# EAGLE board Joystick PCB Board (EAGLE 9.7.0)
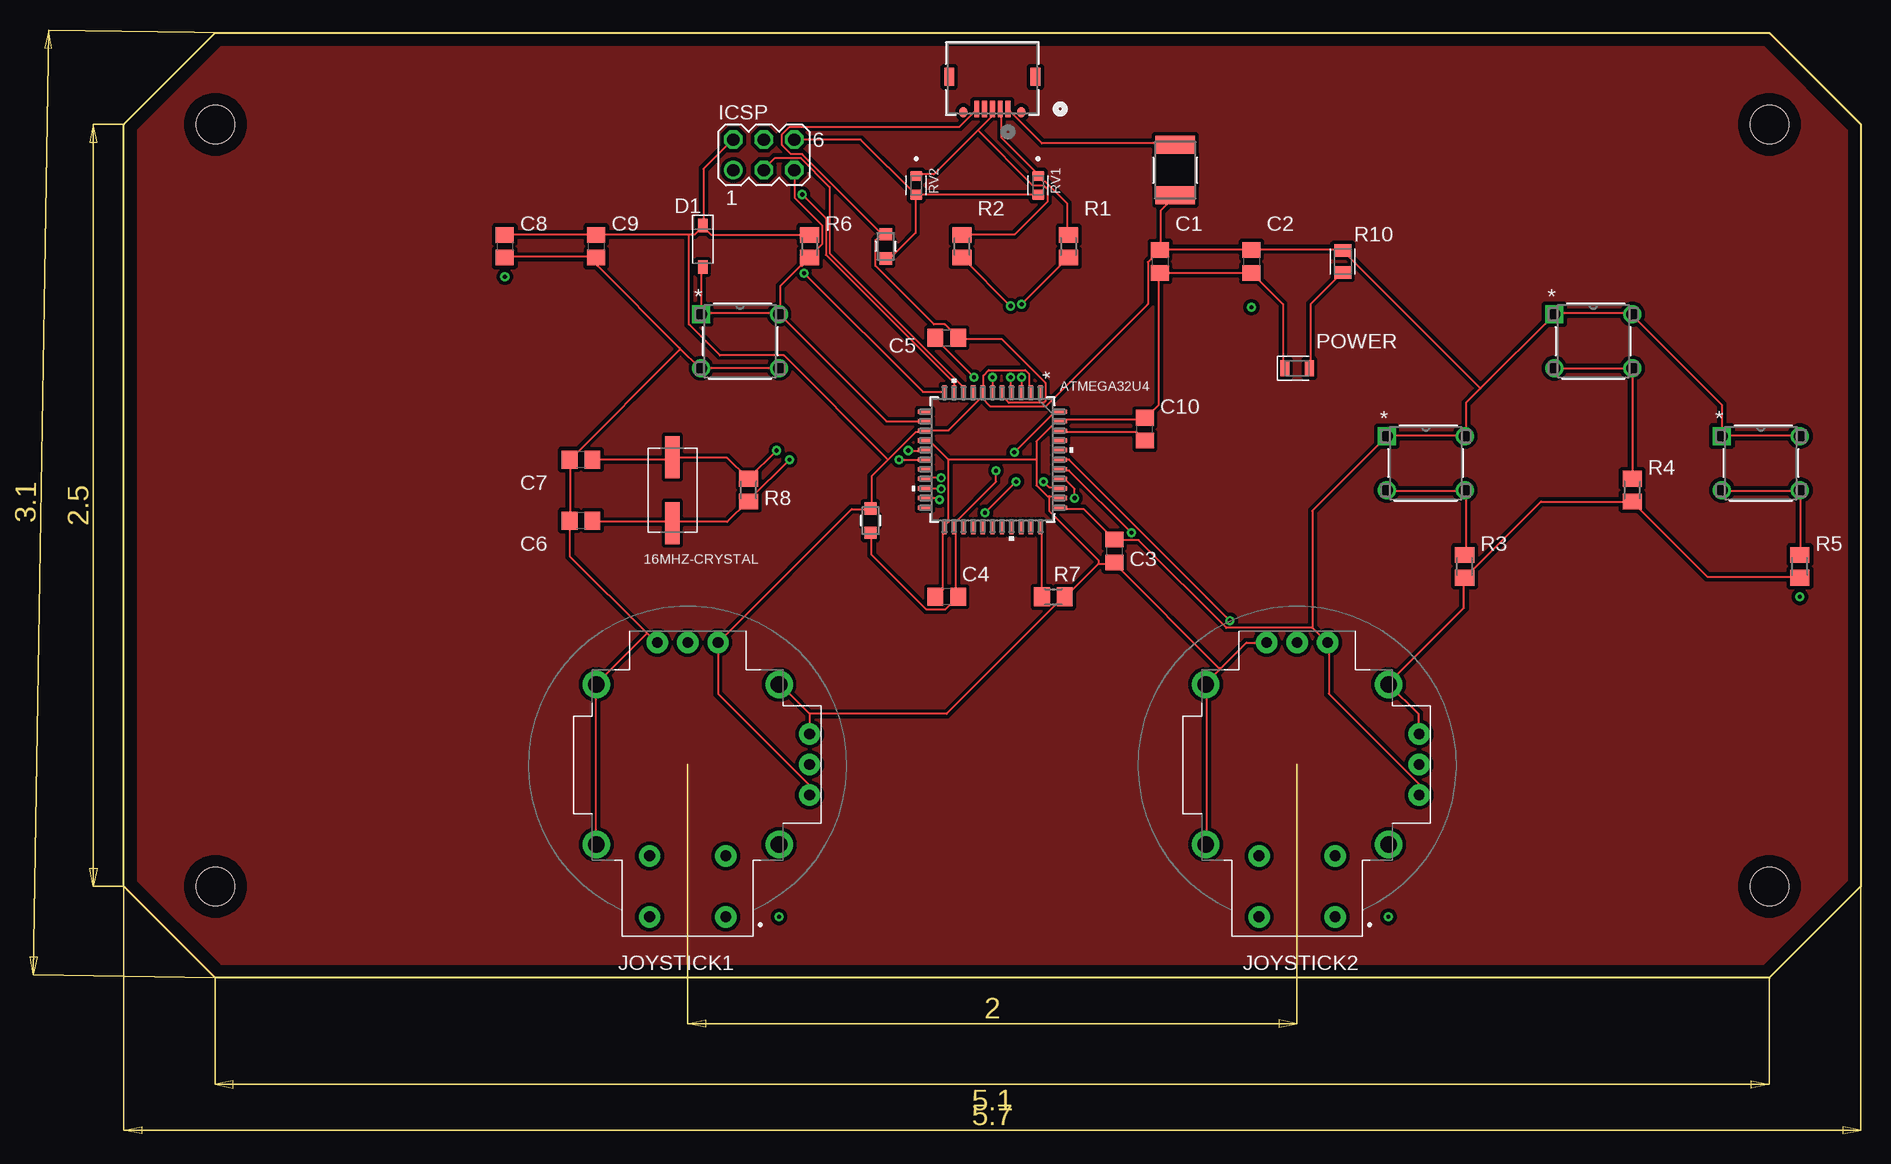
[diagram p0: board, top side]
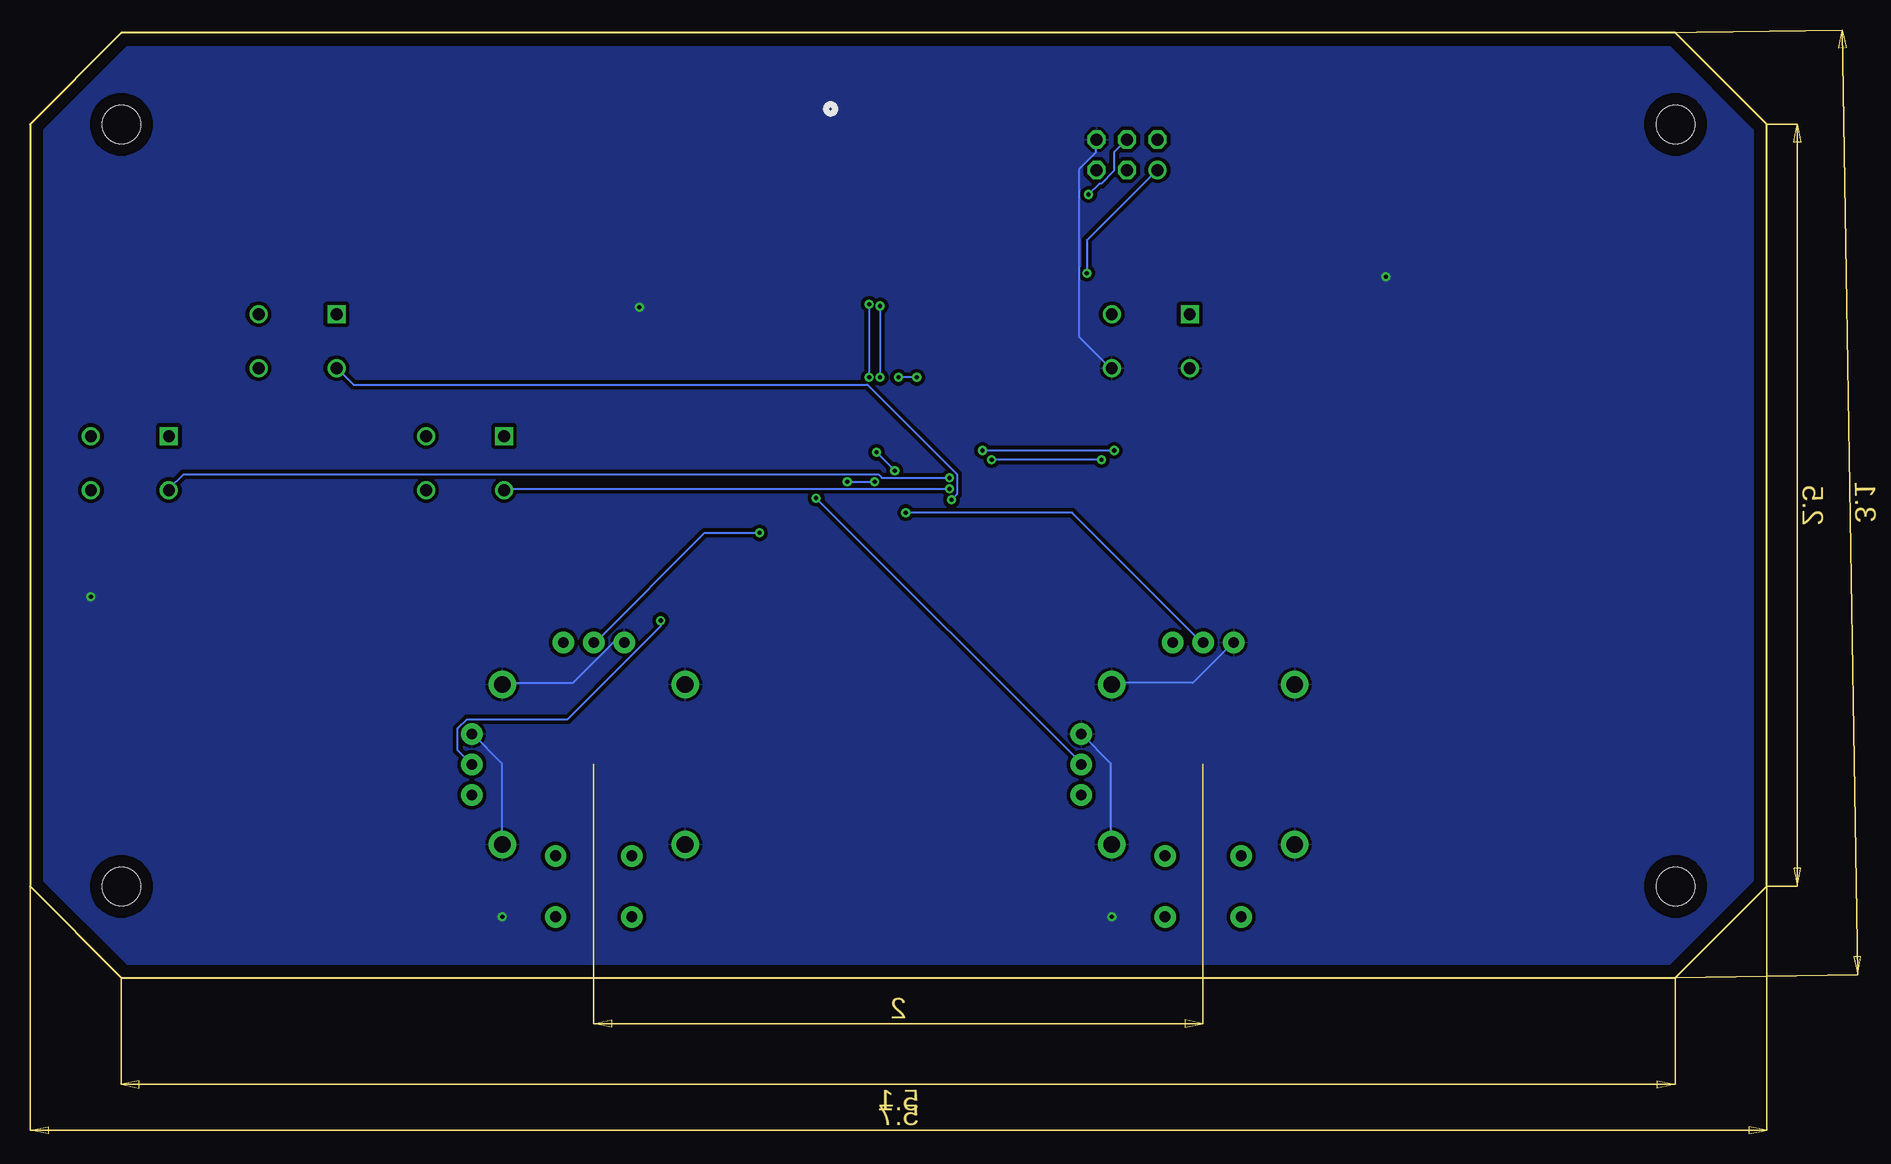
[diagram p1: board, bottom side, seen from below]

Size 144.78 x 78.74 mm. Coordinates in mm from the lower left corner, seen from the top.
Outline: 137.16,78.74 144.78,71.12 144.78,7.62 137.16,0 7.62,0 0,7.62 0,71.12 7.62,78.74 137.16,78.74
Copper layers (1*16): Top / Bottom
Stack-up Default Layer Stack: Top User Defined 0.035mm / Dielectric-1 User Defined 1.5mm / Bottom User Defined 0.035mm
Design rules: minimum drill size 0.35mm, minimum copper width 6mil, keepout clearance 0mil, drill distance 6mil, via restrict clearance 0mil, dimension clearance 40mil, restrict clearance 0mil, copper clearance wire_polygon to wire_polygon 6mil, copper clearance wire_polygon to pad_smd 6mil, copper clearance wire_polygon to via 6mil, copper clearance pad_smd to pad_smd 6mil, copper clearance pad_smd to via 6mil, copper clearance via to via 6mil, copper clearance smd to pad (same net) 6mil, copper clearance smd to via (same net) 6mil, copper clearance smd to smd (same net) 6mil
Holes 3.17 mm at 137.16,71.12 7.62,71.12 7.62,7.62 137.16,7.62

## Footprints (pad centres in the part's own frame; a part is rotated, then mirrored left to right if it is on the bottom)
XTAL_ECS-160-20-3X-TR = smd 3.5 x 1.2: 1 -2.75,0; 2 2.75,0
44ML_ATM-L = smd 1.143 x 0.356: 1 -5.626,4; 2 -5.626,3.2; 3 -5.626,2.4; 4 -5.626,1.6; 5 -5.626,0.8; 6 -5.626,0; 7 -5.626,-0.8; 8 -5.626,-1.6; 9 -5.626,-2.4; 10 -5.626,-3.2; 11 -5.626,-4; 23 5.626,-4; 24 5.626,-3.2; 25 5.626,-2.4; 26 5.626,-1.6; 27 5.626,-0.8; 28 5.626,0; 29 5.626,0.8; 30 5.626,1.6; 31 5.626,2.4; 32 5.626,3.2; 33 5.626,4 | smd 0.356 x 1.143: 12 -4,-5.626; 13 -3.2,-5.626; 14 -2.4,-5.626; 15 -1.6,-5.626; 16 -0.8,-5.626; 17 0,-5.626; 18 0.8,-5.626; 19 1.6,-5.626; 20 2.4,-5.626; 21 3.2,-5.626; 22 4,-5.626; 34 4,5.626; 35 3.2,5.626; 36 2.4,5.626; 37 1.6,5.626; 38 0.8,5.626; 39 0,5.626; 40 -0.8,5.626; 41 -1.6,5.626; 42 -2.4,5.626; 43 -3.2,5.626; 44 -4,5.626
C0805 = smd 1.3 x 1.5: 1 -0.95,0; 2 0.95,0
SOD3715X135 = smd 1.127 x 0.784: 1 -1.722,0; 2 1.722,0
IND_BOURNS_MH2029 = smd 1.016 x 1.016: 1 -1.016,0; 2 1.016,0
FUSE_F050-2 = smd 1.499 x 3.302: 1 -2.095,0; 2 2.095,0
MA03-2 = drill 1.016: 1 -2.54,-1.27 | drill 1.016 octagon: 2 -2.54,1.27; 3 0,-1.27; 4 0,1.27; 5 2.54,-1.27; 6 2.54,1.27
XDCR_COM-09032 = drill 0.9 pad 1.778: B1A -3.175,12.7; B1B 3.175,12.7; B2A -3.175,7.62; B2B 3.175,7.62 | drill 0.889 pad 1.778: H1 -2.54,-10.16; H2 0,-10.16; H3 2.54,-10.16; V1 -10.16,2.54; V2 -10.16,0; V3 -10.16,-2.54 | drill 1.397 pad 2.286: S1 -7.62,6.668; S2 -7.62,-6.668; S3 7.62,-6.668; S4 7.62,6.668
ZX62D-B-5P8(30)_HIR = smd 0.406 x 1.346: 1 -1.3,2.525; 2 -0.65,2.525; 3 0,2.525; 4 0.65,2.525; 5 1.3,2.525 | smd 0.65 x 0.85: 6 -2.425,2.799; 7 2.425,2.799 | smd 0.813 x 1.499: 8 -3.6,-0.15; 9 3.6,-0.15
LEDC2012X110N_FLAT-B = smd 0.762 x 1.362: A 1.025,0; C -1.025,0
M0805 = smd 1.3 x 1.6: 1 -0.95,0; 2 0.95,0
RESC2012X65 = smd 1.031 x 1.42: 1 -0.919,0; 2 0.919,0
VARC1608X56N = smd 0.87 x 1.02: 1 -0.78,0; 2 0.78,0
SW4_1825910-A_TEC = drill 0.991 pad 1.499 square: 1 -6.5,4.5 | drill 0.991 pad 1.499: 2 0,4.5; 3 -6.5,0; 4 0,0

## Placement (x,y rotation side)
16MHZ-CRYSTAL  ECS-160-20-3X-TR  [XTAL_ECS-160-20-3X-TR]  45.72,40.64 270 top
ATMEGA32U4  ATMEGA32U4-AU44ML_ATM-L  [44ML_ATM-L]  72.39,43.18 270 top
C1  10uF  [C0805]  86.36,59.69 270 top
C2  0.1uF  [C0805]  93.98,59.69 270 top
C3  0.1uF  [C0805]  82.55,35.56 270 top
C4  0.1uF  [C0805]  68.58,31.75 180 top
C5  0.1uF  [C0805]  68.58,53.34 0 top
C6  20pF  [C0805]  38.1,38.1 180 top
C7  20pF  [C0805]  38.1,43.18 180 top
C8  0.1uF  [C0805]  31.75,60.96 270 top
C9  0.1uF  [C0805]  39.37,60.96 270 top
C10  0.1uF  [C0805]  85.09,45.72 90 top
D1  1N4148W  [SOD3715X135]  48.26,60.96 270 top
FERRITEBEAD1  MH2029-300YIND_BOURNS_MH2029  [IND_BOURNS_MH2029]  63.5,60.96 90 top
FERRITEBEAD2  MH2029-300YIND_BOURNS_MH2029  [IND_BOURNS_MH2029]  62.23,38.1 90 top
FUSE  MF-MSMF050-2FUSE_F050-2  [FUSE_F050-2]  87.63,67.31 270 top
ICSP  [MA03-2]  53.34,68.58 0 top
JOYSTICK1  COM-09032  [XDCR_COM-09032]  46.99,17.78 180 top
JOYSTICK2  COM-09032  [XDCR_COM-09032]  97.79,17.78 180 top
MICRO_USB  ZX62D-B-5P8(30)ZX62D-B-5P8(30)_HIR  [ZX62D-B-5P8(30)_HIR]  72.39,74.93 180 top
POWER  LED_BLUE  [LEDC2012X110N_FLAT-B]  97.79,50.8 0 top
R1  22  [M0805]  78.74,60.96 90 top
R2  22  [M0805]  69.85,60.96 270 top
R3  10K  [M0805]  111.76,34.29 270 top
R4  10K  [M0805]  125.73,40.64 270 top
R5  10K  [M0805]  139.7,34.29 270 top
R6  10K  [M0805]  57.15,60.96 90 top
R7  10K  [M0805]  77.47,31.75 180 top
R8  1M  [M0805]  52.07,40.64 270 top
R10  1K  [RESC2012X65]  101.6,59.69 270 top
RV1  CG0603MLC-05E  [VARC1608X56N]  76.2,66.04 270 top
RV2  CG0603MLC-05E  [VARC1608X56N]  66.04,66.04 270 top
SW1  1825910-2SW4_1825910-A_TEC  [SW4_1825910-A_TEC]  111.76,40.64 0 top
SW2  1825910-2SW4_1825910-A_TEC  [SW4_1825910-A_TEC]  125.73,50.8 0 top
SW3  1825910-2SW4_1825910-A_TEC  [SW4_1825910-A_TEC]  139.7,40.64 0 top
SW4  1825910-2SW4_1825910-A_TEC  [SW4_1825910-A_TEC]  54.61,50.8 0 top

## Library data of the parts
16MHZ-CRYSTAL = 16MHz Crystal; MANUFACTURER: ECS INC.; PARTREV: 2017; STANDARD: Manufacturer recommendations
ATMEGA32U4 = ATMEGA32U4 Functional; COPYRIGHT: Copyright (C) 2024 Ultra Librarian. All rights reserved.; MANUFACTURER_PART_NUMBER: ATMEGA32U4-AU; MFR_NAME: Microchip
C1-C10 = rcl; SPICEPREFIX: C
D1 = Diode; CATEGORY: Diode; DESCRIPTION: DIODE GEN PURP 100V 300MA SOD123; MANUFACTURER: Diodes Incorporated; SUB-CATEGORY: Rectifier
FERRITEBEAD1 FERRITEBEAD2 = Ferrite Bead; COPYRIGHT: Copyright (C) 2024 Ultra Librarian. All rights reserved.; MANUFACTURER_PART_NUMBER: MH2029-300Y; MFR_NAME: Bourns Electronics
FUSE = Fuse; COPYRIGHT: Copyright (C) 2024 Ultra Librarian. All rights reserved.; MANUFACTURER_PART_NUMBER: MF-MSMF050-2; MFR_NAME: Bourns Electronics
ICSP = con-lstb; OC_FARNELL: unknown; OC_NEWARK: unknown
JOYSTICK1 JOYSTICK2 = Analog Joystick Module; AVAILABILITY: In Stock; CHECK_PRICES: https://www.snapeda.com/parts/COM-09032/SparkFun+Electronics/view-part/?ref=eda; DESCRIPTION: Joystick, 2 - Axis Analog (Resistive) Output; MF: SparkFun Electronics; MP: COM-09032; PACKAGE: Package; PRICE: None; PURCHASE-URL: https://www.snapeda.com/api/url_track_click_mouser/?unipart_id=888157&manufacturer=SparkFun Electronics&part_name=COM-09032&search_term=None; SNAPEDA_LINK: https://www.snapeda.com/parts/COM-09032/SparkFun+Electronics/view-part/?ref=snap
MICRO_USB = Microusb; COPYRIGHT: Copyright (C) 2024 Ultra Librarian. All rights reserved.; MANUFACTURER_PART_NUMBER: ZX62D-B-5P8(30); MFR_NAME: Hirose
POWER = LED; CATEGORY: LED; COLOR: BLUE; DESCRIPTION: CHIP LED FLAT; SUB-CATEGORY: CHIP; TYPE: FLAT_TOP
R1-R8 = rcl; SPICEPREFIX: R
R10 = Resistor; CATEGORY: Resistor; SUB-CATEGORY: Fixed
RV1 RV2 = Varistors; MANUFACTURER: Bourns; MAXIMUM_PACKAGE_HEIGHT: 0.56 mm; PARTREV: E; STANDARD: IPC 7351B
SW1-SW4 = 4-pin Button; COPYRIGHT: Copyright (C) 2024 Ultra Librarian. All rights reserved.; MANUFACTURER_PART_NUMBER: 1825910-2; MFR_NAME: TE Connectivity

## Nets
+5V: ATMEGA32U4.2 ATMEGA32U4.7 ATMEGA32U4.14 ATMEGA32U4.34 C1.1 C2.1 C3.1 C8.1 C9.1 D1.1 FERRITEBEAD2.2 FUSE.2 ICSP.2 JOYSTICK1.H1 JOYSTICK1.V1 JOYSTICK2.H1 JOYSTICK2.V1 R6.2 R10.1 SW1.1 SW1.2 SW2.1 SW2.2 SW3.1 SW3.2
A0: ATMEGA32U4.36 JOYSTICK1.H2
A1: ATMEGA32U4.37 JOYSTICK1.V2
A2: ATMEGA32U4.38 JOYSTICK2.H2
A3: ATMEGA32U4.39 JOYSTICK2.V2
AREF: ATMEGA32U4.42 C10.1
AVCC: ATMEGA32U4.24 ATMEGA32U4.44 C4.1 FERRITEBEAD2.1
D0: ATMEGA32U4.20 R3.1 SW1.3 SW1.4
D1: ATMEGA32U4.21 R4.1 SW2.3 SW2.4
D2: ATMEGA32U4.19 R5.1 SW3.3 SW3.4
D+: MICRO_USB.3 R2.1 RV2.1
D-: MICRO_USB.2 R1.2 RV1.1
GND: ATMEGA32U4.15 ATMEGA32U4.23 ATMEGA32U4.35 ATMEGA32U4.43 C1.2 C2.2 C3.2 C4.2 C6.2 C7.2 C8.2 C9.2 C10.2 FERRITEBEAD1.1 ICSP.6 JOYSTICK1.H3 JOYSTICK1.S1 JOYSTICK1.S2 JOYSTICK1.S3 JOYSTICK1.S4 JOYSTICK1.V3 JOYSTICK2.H3 JOYSTICK2.S1 JOYSTICK2.S2 JOYSTICK2.S3 JOYSTICK2.S4 JOYSTICK2.V3 POWER.C R3.2 R4.2 R5.2 R7.1 RV1.2 RV2.2 SW4.3 SW4.4
HWB: ATMEGA32U4.33 R7.2
MISO: ATMEGA32U4.11 ICSP.1
MOSI: ATMEGA32U4.10 ICSP.4
N$3: POWER.A R10.2
RD+: ATMEGA32U4.4 R2.2
RD-: ATMEGA32U4.3 R1.1
RESET: ATMEGA32U4.13 D1.2 ICSP.5 R6.1 SW4.1 SW4.2
SCK: ATMEGA32U4.9 ICSP.3
UCAP: ATMEGA32U4.6 C5.1
UGND: ATMEGA32U4.5 C5.2 FERRITEBEAD1.2 MICRO_USB.5
VUSB: FUSE.1 MICRO_USB.1
XTAL1: 16MHZ-CRYSTAL.2 ATMEGA32U4.17 C6.1 R8.2
XTAL2: 16MHZ-CRYSTAL.1 ATMEGA32U4.16 C7.1 R8.1

## Tracks (layer width: path | path; a pad name or v marks a point on that pad's centre or on a via)
+5V
  Top 0.152: C8.1 31.85,61.92 39.32,61.92 C9.1 39.47,61.92 47.09,61.92 | D1.1 48.31,62.69 48.31,67.41 50.75,69.85 ICSP.2 | R6.2 57.15,61.92 48.92,61.92 48.31,62.53 D1.1 | 47.09,61.92 47.55,61.92 48.16,62.53 D1.1 | 63.7,43.18 65.99,45.47 66.75,45.47 ATMEGA32U4.14 66.9,45.62 68.73,45.62 71.48,48.36 | 63.7,43.18 62.33,41.81 62.33,39.22 FERRITEBEAD2.2 62.18,39.06 60.66,39.06 JOYSTICK1.H1 49.53,23.67 57.15,16.05 JOYSTICK1.V1 | 71.48,48.36 71.48,48.67 ATMEGA32U4.7 | ATMEGA32U4.2 75.44,48.82 75.44,50.34 75.13,50.65 72.08,50.65 71.63,50.19 71.63,48.82 ATMEGA32U4.7 | 47.09,61.92 47.09,54.46 49.68,51.87 55.02,51.87 63.7,43.18 | ATMEGA32U4.34 78.03,39.06 80.01,39.06 82.45,36.63 C3.1 82.6,36.47 84.58,36.47 91.9,29.16 99.06,29.16 | JOYSTICK2.V1 107.9,15.29 107.9,16.2 100.43,23.67 100.43,27.94 JOYSTICK2.H1 100.28,27.94 99.06,29.16 | 86.41,60.71 86.41,63.91 87.63,65.13 FUSE.2 | 86.41,60.71 93.88,60.71 C2.1 94.03,60.71 101.5,60.71 R10.1 101.65,60.55 113.08,49.12 | 86.41,60.71 C1.1 86.26,60.55 85.34,59.64 85.34,56.13 76.81,47.6 72.24,47.6 71.48,48.36 | SW3.2 139.6,45.16 133.35,45.16 SW3.1 133.2,45.16 133.2,47.75 125.73,55.22 SW2.2 125.73,55.37 119.33,55.37 SW2.1 119.18,55.22 113.08,49.12 | 113.08,49.12 111.86,47.9 111.86,45.16 SW1.2 111.71,45.16 105.31,45.16 SW1.1 105.16,45.01 99.06,38.91 99.06,29.16 | 71.48,48.36 ATMEGA32U4.7
A0  (via drill 0.35)
  Top 0.152: v76.66,41.35 77.11,40.89 77.88,40.89 ATMEGA32U4.36 | v71.78,38.76 v74.37,41.35
  Bottom 0.152: v76.66,41.35 v74.37,41.35 | v71.78,38.76 57.91,38.76 47.09,27.94 JOYSTICK1.H2
A1  (via drill 0.35)
  Top 0.152: v79.25,39.98 79.25,40.74 78.49,41.5 78.03,41.5 ATMEGA32U4.37
  Bottom 0.152: v79.25,39.98 57.15,17.88 JOYSTICK1.V2
A2  (via drill 0.35)
  Top 0.152: v83.97,37.08 78.79,42.27 78.03,42.27 ATMEGA32U4.38
  Bottom 0.152: v83.97,37.08 88.54,37.08 97.69,27.94 JOYSTICK2.H2
A3  (via drill 0.35)
  Top 0.152: ATMEGA32U4.39 78.79,43.18 v92.2,29.77
  Bottom 0.152: v92.2,29.77 92.2,29.31 99.97,21.54 108.36,21.54 109.12,20.78 109.12,18.95 JOYSTICK2.V2
AREF
  Top 0.152: ATMEGA32U4.42 78.03,45.47 84.43,45.47 85.04,44.86 C10.1
AVCC  (via drill 0.35)
  Top 0.152: 69.34,31.6 69.49,31.75 C4.1 69.34,31.6 | 69.34,31.6 68.43,30.68 66.9,30.68 62.33,35.26 62.33,37.08 FERRITEBEAD2.1 | 69.34,31.6 69.34,37.54 ATMEGA32U4.24 69.34,37.69 69.34,38 72.7,41.35 v72.7,42.27 | v74.22,43.79 77.57,47.14 77.88,47.14 ATMEGA32U4.44
  Bottom 0.152: v72.7,42.27 v74.22,43.79
D0  (via drill 0.35)
  Top 0.152: R3.1 111.86,35.26 111.86,40.59 SW1.4 111.71,40.59 105.31,40.59 SW1.3 | v68.12,40.74 66.9,40.74 ATMEGA32U4.20
  Bottom 0.152: v68.12,40.74 105.16,40.74 SW1.3
D1  (via drill 0.35)
  Top 0.152: R4.1 SW2.4 SW2.3 | v67.97,39.83 67.82,39.98 66.9,39.98 ATMEGA32U4.21
  Bottom 0.152: v67.97,39.83 67.51,40.28 67.51,41.96 74.98,49.43 117.81,49.43 119.18,50.8 SW2.3
D2  (via drill 0.35)
  Top 0.152: R5.1 139.75,35.26 139.75,40.59 SW3.4 139.6,40.59 133.35,40.59 SW3.3 | v68.12,41.66 66.9,41.66 ATMEGA32U4.19
  Bottom 0.152: v68.12,41.66 73.76,41.66 74.07,41.96 131.98,41.96 133.2,40.74 SW3.3
D+
  Top 0.152: 71.17,70.61 72.39,71.83 MICRO_USB.3 | 71.17,70.61 67.51,66.95 66.14,66.95 RV2.1 | 71.17,70.61 75.74,66.04 76.66,66.04 76.96,65.73 76.96,64.67 74.22,61.92 69.95,61.92 R2.1
D-
  Top 0.152: R1.2 78.64,61.92 78.64,64.52 76.81,66.34 76.66,66.34 76.2,66.8 RV1.1 76.2,66.95 73.15,70 73.15,72.29 MICRO_USB.2
GND  (via drill 0.35)
  Top 0.152: 57.15,22 JOYSTICK1.V3 | 57.15,22 54.71,24.43 JOYSTICK1.S2 | JOYSTICK1.S4 39.32,11.18 39.32,24.43 JOYSTICK1.S3 39.47,24.59 43.59,28.7 | 37.19,43.18 37.19,38.15 C6.2 37.19,38 37.19,35.1 43.59,28.7 | 43.59,28.7 44.35,27.94 JOYSTICK1.H3 | FERRITEBEAD1.1 63.86,59.94 65.99,62.08 65.99,65.13 RV2.2 | RV1.2 76.2,65.28 66.14,65.28 RV2.2 | ICSP.6 61.42,69.85 65.99,65.28 RV2.2 | C8.2 31.85,60.1 39.32,60.1 C9.2 39.47,59.94 39.47,59.33 46.33,52.48 | SW4.4 SW4.3 48.01,50.8 46.33,52.48 | 37.19,43.18 46.33,52.32 46.33,52.48 | 37.19,43.18 C7.2 | POWER.C 96.62,50.8 96.62,56.13 94.03,58.73 C2.2 93.88,58.73 86.41,58.73 C1.2 86.26,58.73 86.26,47.75 85.19,46.69 C10.2 85.04,46.53 78.18,46.53 ATMEGA32U4.43 77.88,46.23 77.57,46.23 76.05,44.7 76.05,43.18 | C4.2 67.67,31.75 68.28,32.36 68.28,37.54 ATMEGA32U4.23 68.43,37.69 68.73,38 68.73,43.18 | 68.73,43.18 67.21,44.7 66.9,44.7 ATMEGA32U4.15 | 81.23,34.49 82.45,34.49 C3.2 82.6,34.49 91.29,25.81 91.44,25.81 | 81.23,34.49 78.49,31.75 R7.1 78.33,31.75 68.58,22 57.15,22 | 77.11,40.13 76.96,40.13 76.05,41.05 76.05,43.18 | 77.11,40.13 77.88,40.13 ATMEGA32U4.35 | 81.23,34.49 81.23,34.8 77.11,38.91 77.11,40.13 | 76.05,43.18 68.73,43.18 | JOYSTICK2.H3 93.57,27.94 91.44,25.81 | 91.44,25.81 90.22,24.59 JOYSTICK2.S3 90.22,24.43 90.22,11.18 JOYSTICK2.S4 | 125.73,39.67 118.11,39.67 111.86,33.43 R3.2 111.71,33.27 111.71,30.84 105.46,24.59 JOYSTICK2.S2 105.46,24.43 107.9,22 107.9,20.32 JOYSTICK2.V3 | 125.73,39.67 131.98,33.43 139.6,33.43 R5.2 | 125.73,39.67 R4.2
  Bottom 0.152: JOYSTICK1.V3 54.71,17.88 54.71,11.18 JOYSTICK1.S1 | JOYSTICK1.S2 54.56,24.59 47.85,24.59 44.5,27.94 JOYSTICK1.H3 | ICSP.6 55.93,69.85 55.93,68.78 57.3,67.41 57.3,53.39 54.71,50.8 SW4.4 | JOYSTICK2.S1 105.46,11.18 105.46,17.88 107.9,20.32 JOYSTICK2.V3 | JOYSTICK2.H3 96.16,27.94 99.52,24.59 105.31,24.59 JOYSTICK2.S2
  other vias: 31.75,58.42 54.61,5.08 105.41,5.08 139.7,31.75 93.98,55.88
  pour Bottom (isolate 0.305): 7.62,80.01 137.16,80.01 146.05,71.12 146.05,7.62 137.16,-1.27 7.62,-1.27 -1.27,7.62 -1.27,71.12
HWB
  Top 0.152: ATMEGA32U4.33 76.5,37.54 76.5,31.75 R7.2
MISO  (via drill 0.35)
  Top 0.152: v56.69,58.73 66.6,48.82 68.28,48.82 ATMEGA32U4.11
  Bottom 0.152: v56.69,58.73 56.69,61.47 50.9,67.26 ICSP.1
MOSI  (via drill 0.35)
  Top 0.152: v56.54,65.28 58.52,63.3 58.52,60.25 69.19,49.58 ATMEGA32U4.10
  Bottom 0.152: v56.54,65.28 55.63,66.19 55.47,66.19 54.41,67.26 54.41,68.78 ICSP.4
N$1
  pour Top (isolate 0.305): 7.62,80.01 137.16,80.01 146.05,71.12 146.05,7.62 137.16,-1.27 7.62,-1.27 -1.27,7.62 -1.27,71.12
N$3
  Top 0.152: POWER.A 98.91,50.8 98.91,56.13 101.5,58.73 R10.2
RD+  (via drill 0.35)
  Top 0.152: v73.91,50.04 73.91,48.82 ATMEGA32U4.4 | v73.91,55.98 69.95,59.94 R2.2
  Bottom 0.152: v73.91,55.98 v73.91,50.04
RD-  (via drill 0.35)
  Top 0.152: v74.83,50.04 74.83,48.82 ATMEGA32U4.3 | v74.83,56.13 78.64,59.94 R1.1
  Bottom 0.152: v74.83,56.13 v74.83,50.04
RESET
  Top 0.152: 48.16,55.37 48.16,59.18 D1.2 | ATMEGA32U4.13 63.55,46.38 54.71,55.22 SW4.2 | SW4.2 54.71,55.37 54.71,57.66 56.39,59.33 56.54,59.33 57.15,59.94 R6.1 57.15,60.1 58.22,61.16 58.22,62.69 55.93,64.97 55.93,67.26 ICSP.5 | 48.16,55.37 54.56,55.37 SW4.2 | 48.16,55.37 SW4.1
SCK
  Top 0.152: ATMEGA32U4.9 69.95,48.82 69.95,49.28 58.83,60.4 58.83,65.89 56.39,68.33 54.25,68.33 53.34,67.41 ICSP.3
UCAP  (via drill 0.35)
  Top 0.152: v72.39,50.04 ATMEGA32U4.6 | v70.87,50.04 67.67,53.24 C5.1
  Bottom 0.152: v70.87,50.04 v72.39,50.04
UGND
  Top 0.152: 63.25,61.92 63.09,61.92 62.64,61.47 62.64,59.33 67.51,54.46 68.43,54.46 69.49,53.39 C5.2 69.65,53.24 73.15,53.24 76.81,49.58 76.81,48.06 76.66,47.9 73.76,47.9 73.3,48.36 73.3,48.67 ATMEGA32U4.5 | 63.25,61.92 63.4,61.92 FERRITEBEAD1.2 63.25,61.92 | 63.25,61.92 56.54,68.63 55.63,68.63 54.86,69.39 54.86,70.31 55.47,70.92 69.65,70.92 71.02,72.29 MICRO_USB.5
VUSB
  Top 0.152: MICRO_USB.1 73.76,72.29 76.5,69.55 87.63,69.55 FUSE.1
XTAL1  (via drill 0.35)
  Top 0.152: 45.72,38 39.17,38 C6.1 | v64.62,43.18 ATMEGA32U4.17 | v55.47,43.18 52.12,39.83 R8.2 51.97,39.67 50.29,38 45.72,38 | 45.72,38 16MHZ-CRYSTAL.2
  Bottom 0.152: v55.47,43.18 v64.62,43.18
XTAL2  (via drill 0.35)
  Top 0.152: C7.1 45.57,43.18 45.72,43.33 | v65.38,43.94 66.75,43.94 ATMEGA32U4.16 | v54.41,43.94 52.12,41.66 R8.1 51.97,41.66 50.29,43.33 45.72,43.33 | 45.72,43.33 16MHZ-CRYSTAL.1
  Bottom 0.152: v54.41,43.94 v65.38,43.94